# Allegro board METO_STM_CRY_V0_14.brd
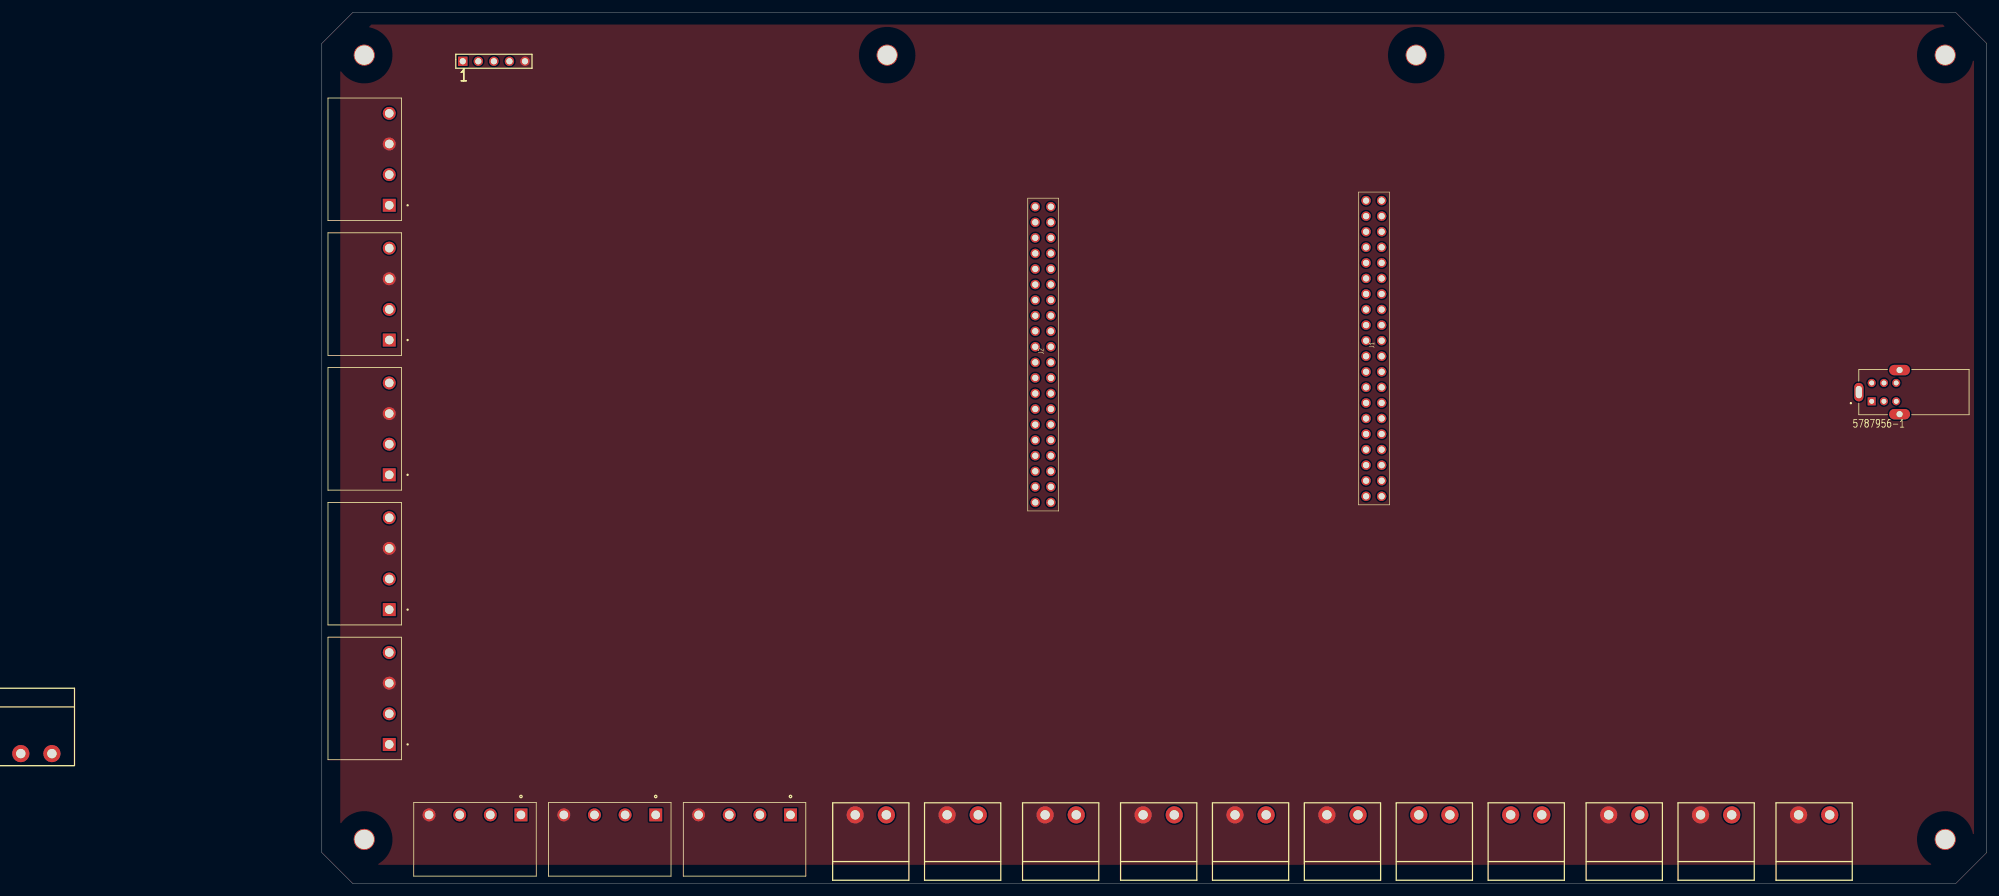
[diagram p0: board, top side]
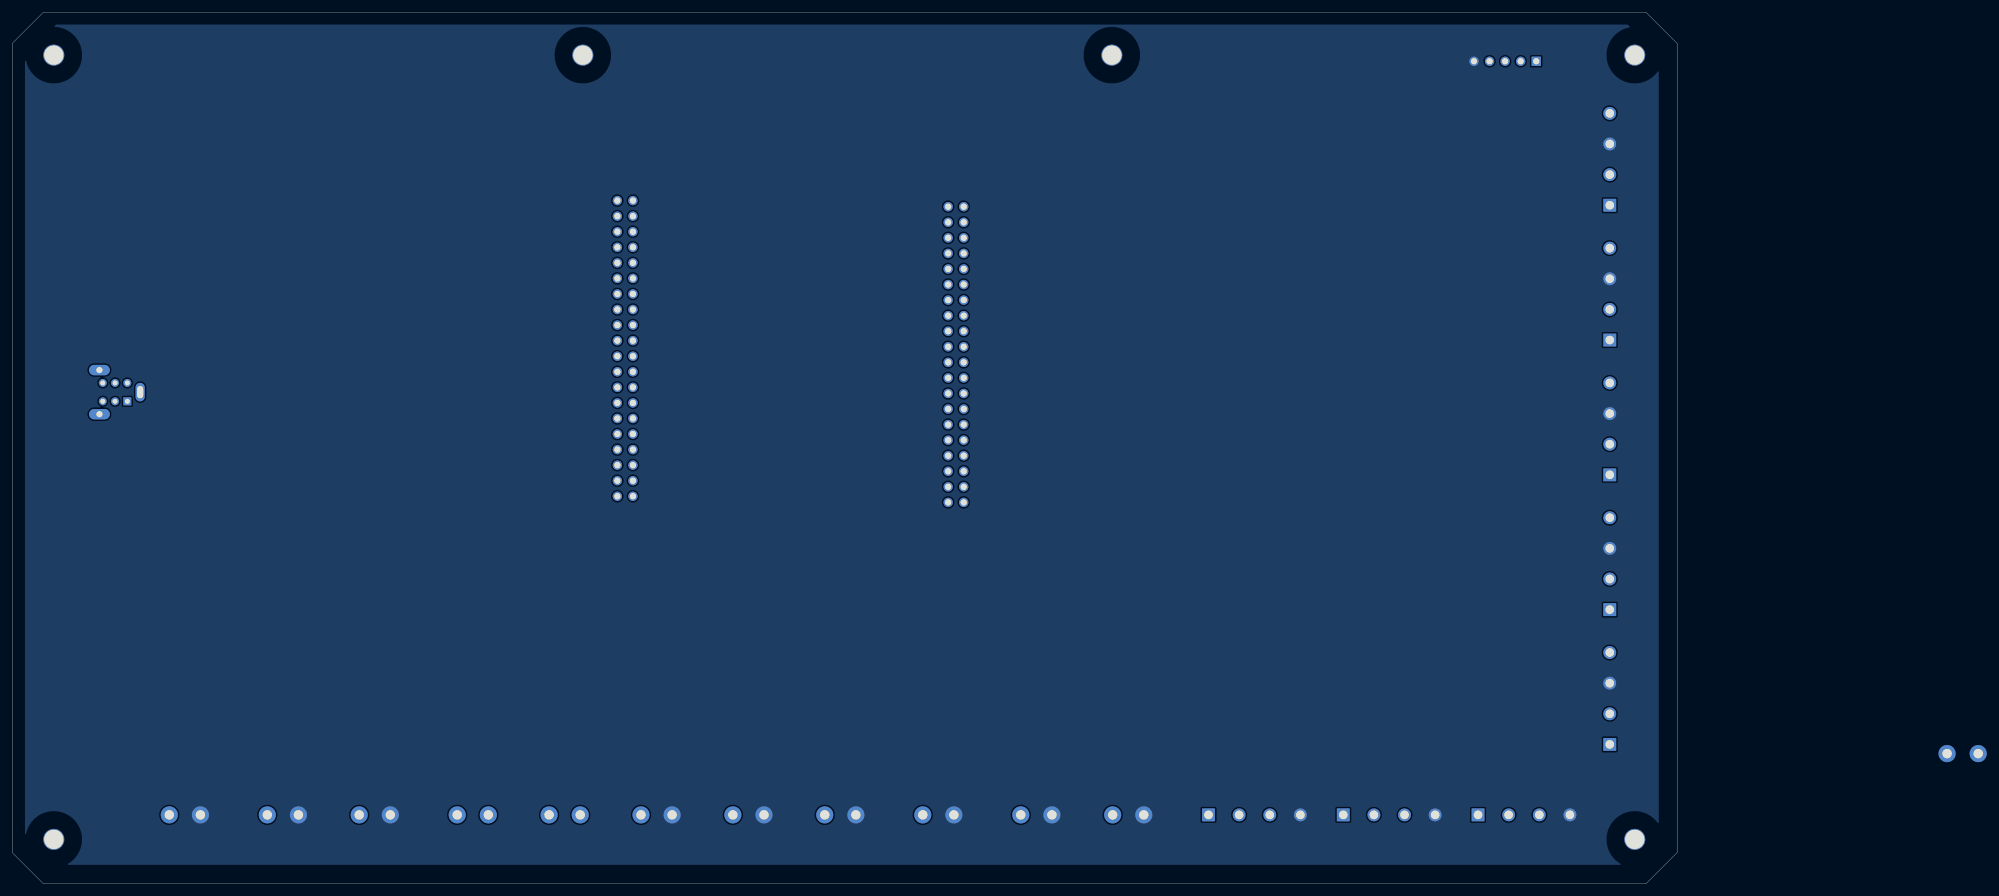
[diagram p1: board, bottom side, seen from below]

Outline 271.78 x 142.24 mm; copper layers: TOP, BOTTOM. Coordinates in mm from the lower left corner of the outline.
Outline path: 0,137.16 0,5.08 5.08,0 266.7,0 271.78,5.08 271.78,137.16 266.7,142.24 5.08,142.24 0,137.16

## Design rules (mm)
constraint set DEFAULT: min track width 0.203

## Placement (name value [footprint] x y rotation side)
J1  FH_2x20SG  [FH2X20SG]  173 63.24 90 top
J2  FH_2x20SG  [FH2X20SG]  119 62.24 90 top
J3  -  [2LI_KLEMENS_200MILS]  152 11.24 180 top
J4  -  [2LI_KLEMENS_200MILS]  167 11.24 180 top
J5  282811-4  [TE_282811-4]  11 118.24 90 top
J6  -  [2LI_KLEMENS_200MILS]  182 11.24 180 top
J7  -  [2LI_KLEMENS_200MILS]  198 11.24 180 top
J8  282811-4  [TE_282811-4]  11 96.24 90 top
J9  -  [2LI_KLEMENS_200MILS]  137 11.24 180 top
J10  282811-4  [TE_282811-4]  11 74.24 90 top
J11  282811-4  [TE_282811-4]  47 11.24 180 top
J12  -  [2LI_KLEMENS_200MILS]  122 11.24 180 top
J13  282811-4  [TE_282811-4]  11 52.24 90 top
J14  282811-4  [TE_282811-4]  69 11.24 180 top
J15  -  [2LI_KLEMENS_200MILS]  106 11.24 180 top
J16  282811-4  [TE_282811-4]  11 30.24 90 top
J17  -  [2LI_KLEMENS_200MILS]  90 11.24 180 top
J18  -  [2LI_KLEMENS_200MILS]  75 11.24 180 top
J19  -  [2LI_KLEMENS_200MILS]  -32 21.24 0 top
J20  282811-4  [TE_282811-4]  25 11.24 180 top
J21  -  [2LI_KLEMENS_200MILS]  213 11.24 180 top
J22  -  [2LI_KLEMENS_200MILS]  229 11.24 180 top
J23  5787956-1  [TE_5787956-1]  255 80.24 0 top
J24  CON5  [CON5X140PROG]  23 134.24 0 top
NOREF  -  [unnamed]  92.28 135.24 0 top
NOREF#2  -  [unnamed]  6.92 7.24 0 top
NOREF#3  -  [unnamed]  265 7.24 0 top
NOREF#4  -  [unnamed]  265 135.24 0 top
NOREF#5  -  [unnamed]  178.64 135.24 0 top
NOREF#6  -  [unnamed]  6.92 135.24 0 top

## Library data of the parts
J1 J2 = FH_2x20SG
J3 J4 J6 J7 J9 J12 J15 J17-J19 J21 J22 = CON2_2LI_KLEMENS_200MILS_CON2
J5 J8 J10 J11 J13 J14 J16 J20 = 282811-4
J23 = 5787956-1
J24 = CON5

## Footprints (pads in the part's own frame, mm; a bottom-side part is the same pattern mirrored in y, then rotated)
2LI_KLEMENS_200MILS
  round 2.794 hole 1.524: 1(-17.145,0) 2(-12.065,0)
CON5X140PROG
  rect 1.524x1.524 hole 1.016: 1(0,0)
  round 1.524 hole 1.016: 2(2.54,0) 3(5.08,0) 4(7.62,0) 5(10.16,0)
FH2X20SG
  round 1.53 hole 1.02: 1(0,0) 2(0,2.54) 3(2.54,0) 4(2.54,2.54) 5(5.08,0) 6(5.08,2.54) 7(7.62,0) 8(7.62,2.54) 9(10.16,0) 10(10.16,2.54) 11(12.7,0) 12(12.7,2.54) 13(15.24,0) 14(15.24,2.54) 15(17.78,0) 16(17.78,2.54) 17(20.32,0) 18(20.32,2.54) 19(22.86,0) 20(22.86,2.54) 21(25.4,0) 22(25.4,2.54) 23(27.94,0) 24(27.94,2.54) 25(30.48,0) 26(30.48,2.54) 27(33.02,0) 28(33.02,2.54) 29(35.56,0) 30(35.56,2.54) 31(38.1,0) 32(38.1,2.54) 33(40.64,0) 34(40.64,2.54) 35(43.18,0) 36(43.18,2.54) 37(45.72,0) 38(45.72,2.54) 39(48.26,0) 40(48.26,2.54)
TE_282811-4
  rect 2.1x2.1 hole 1.4: 1(-7.5,0)
  round 2.1 hole 1.4: 2(-2.5,0) 3(2.5,0) 4(7.5,0)
TE_5787956-1
  rect 1.308x1.308 hole 0.8: 1(-2,-1.5)
  round 1.308 hole 0.8: 2(-2,1.5) 3(0,-1.5) 4(0,1.5) 5(2,-1.5) 6(2,1.5)
  oval 1.508x3.016 hole 1x2: S1(-4.1,0)
  oval 3.4x1.7 hole 1: S2(2.55,3.6) S3(2.55,-3.6)
unnamed
  round 3.429 hole 3.124: (0,0)

## Nets
3.3V: J24.1
GND: J3.2 J5.3 J7.2 J8.3 J9.2 J10.3 J11.4 J12.2 J13.3 J14.4 J15.2 J16.3 J17.2 J18.2 J20.4 J21.2 J22.2 J24.5
VDD5VIN: J11.1 J14.1 J20.3
485_A: J23.5
485_B: J23.6
CON_A_PIN_1: J1.1
CON_A_PIN_2: J1.2
CON_A_PIN_3: J1.3
CON_A_PIN_4: J1.4 J22.1
CON_A_PIN_5: J1.5
CON_A_PIN_6: J1.6
CON_A_PIN_7: J1.7
CON_A_PIN_9: J1.9
CON_A_PIN_10: J1.10
CON_A_PIN_11: J1.11
CON_A_PIN_12: J1.12
CON_A_PIN_13: J1.13
CON_A_PIN_14: J1.14
CON_A_PIN_15: J1.15 J1.25
CON_A_PIN_16: J1.16
CON_A_PIN_17: J1.17 J1.27
CON_A_PIN_18: J1.18
CON_A_PIN_19: J1.8 J1.19 J1.20 J1.22 J2.9 J2.20 J2.32
CON_A_PIN_21: J1.21
CON_A_PIN_23: J1.23
CON_A_PIN_24: J1.24
CON_A_PIN_26: J1.26
CON_A_PIN_28: J1.28 J17.1
CON_A_PIN_29: J1.29
CON_A_PIN_30: J1.30
CON_A_PIN_31: J1.31
CON_A_PIN_32: J1.32 J21.1
CON_A_PIN_33: J1.33
CON_A_PIN_34: J1.34 J13.1
CON_A_PIN_35: J1.35
CON_A_PIN_36: J1.36 J16.1
CON_A_PIN_37: J1.37
CON_A_PIN_38: J1.38
CON_A_PIN_39: J1.39
CON_A_PIN_40: J1.40
CON_B_PIN_1: J2.1 J15.1
CON_B_PIN_2: J2.2 J7.1
CON_B_PIN_3: J2.3 J11.2
CON_B_PIN_4: J2.4
CON_B_PIN_5: J2.5 J11.3
CON_B_PIN_6: J2.6 J14.2
CON_B_PIN_7: J2.7
CON_B_PIN_8: J2.8
CON_B_PIN_10: J2.10
CON_B_PIN_11: J2.11 J12.1
CON_B_PIN_12: J2.12
CON_B_PIN_13: J2.13
CON_B_PIN_14: J2.14
CON_B_PIN_15: J2.15
CON_B_PIN_16: J2.16
CON_B_PIN_17: J2.17 J9.1
CON_B_PIN_18: J2.18 J18.1
CON_B_PIN_19: J2.19 J3.1
CON_B_PIN_21: J2.21 J5.4 J8.4 J10.4 J13.4 J16.4
CON_B_PIN_22: J2.22 J16.2
CON_B_PIN_23: J2.23 J10.2
CON_B_PIN_24: J2.24 J13.2
CON_B_PIN_25: J2.25 J8.2
CON_B_PIN_26: J2.26
CON_B_PIN_27: J2.27 J5.2
CON_B_PIN_28: J2.28
CON_B_PIN_29: J2.29 J10.1
CON_B_PIN_30: J2.30
CON_B_PIN_31: J2.31 J8.1
CON_B_PIN_33: J2.33 J5.1
CON_B_PIN_34: J2.34 J14.3
CON_B_PIN_35: J2.35
CON_B_PIN_36: J2.36
CON_B_PIN_37: J2.37
CON_B_PIN_38: J2.38
CON_B_PIN_39: J2.39
CON_B_PIN_40: J2.40
ENCODER_A: J20.1
ENCODER_B: J20.2
FGND: J19.2
RELAY1_1: J4.1
RELAY1_2: J4.2
RELAY2_1: J6.1
RELAY2_2: J6.2
SWCLK: J24.2
SWDIO: J24.3
VDC_5V: J19.1
N9098499: J23.S1 J23.S2 J23.S3(SHIELD__2)

Pads without a net: J23 1 2 3 4; J24 4

## Copper pours and planes (outline as drawn; the poured copper is in the pictures)
GND on TOP, BOTTOM: 8.08,3.08 264.62,3.08 269.7,8.16 269.7,135.16 264.62,140.24 8.08,140.24 3,135.16 3,8.16
